# Altium PCB Neuralink.PcbDoc
Units mm, origin at the board's own origin, x right, y up, seen from the top; angles counter-clockwise.
Board outline 30 x 30 mm, 2 copper layers (Top Layer, Bottom Layer); 39 components, 25 nets, 205 pads, 47 vias.
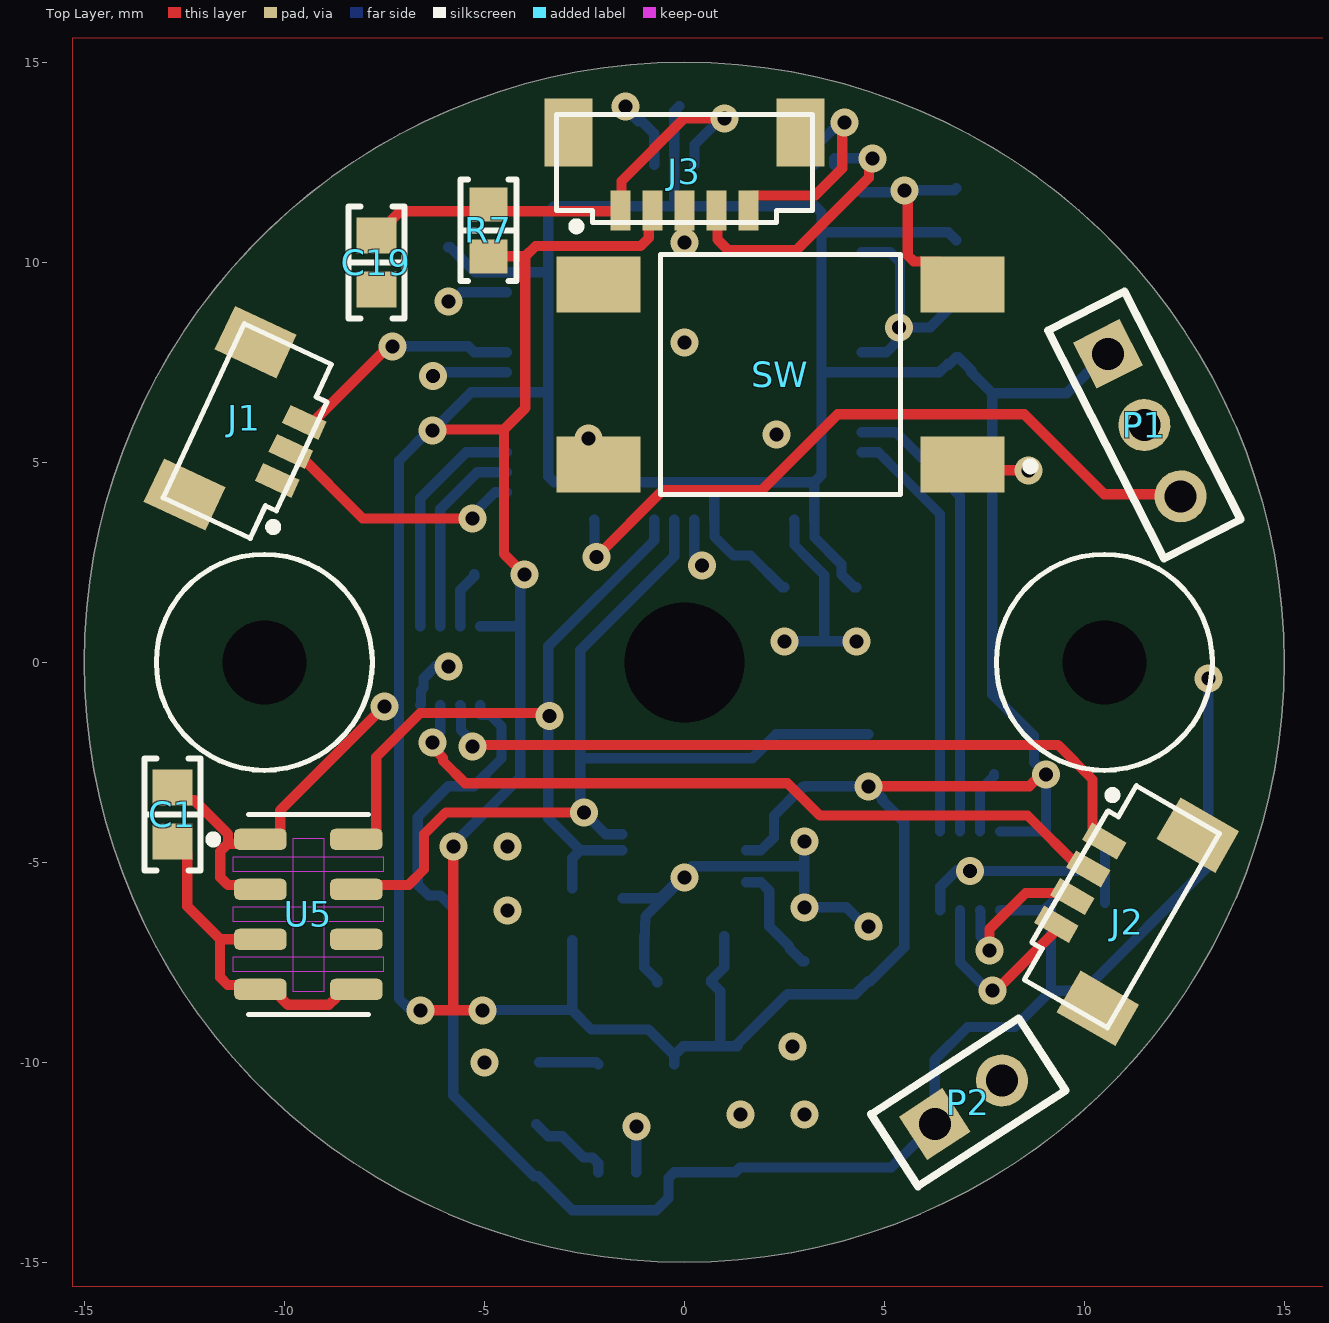
[diagram p0: Top Layer view]
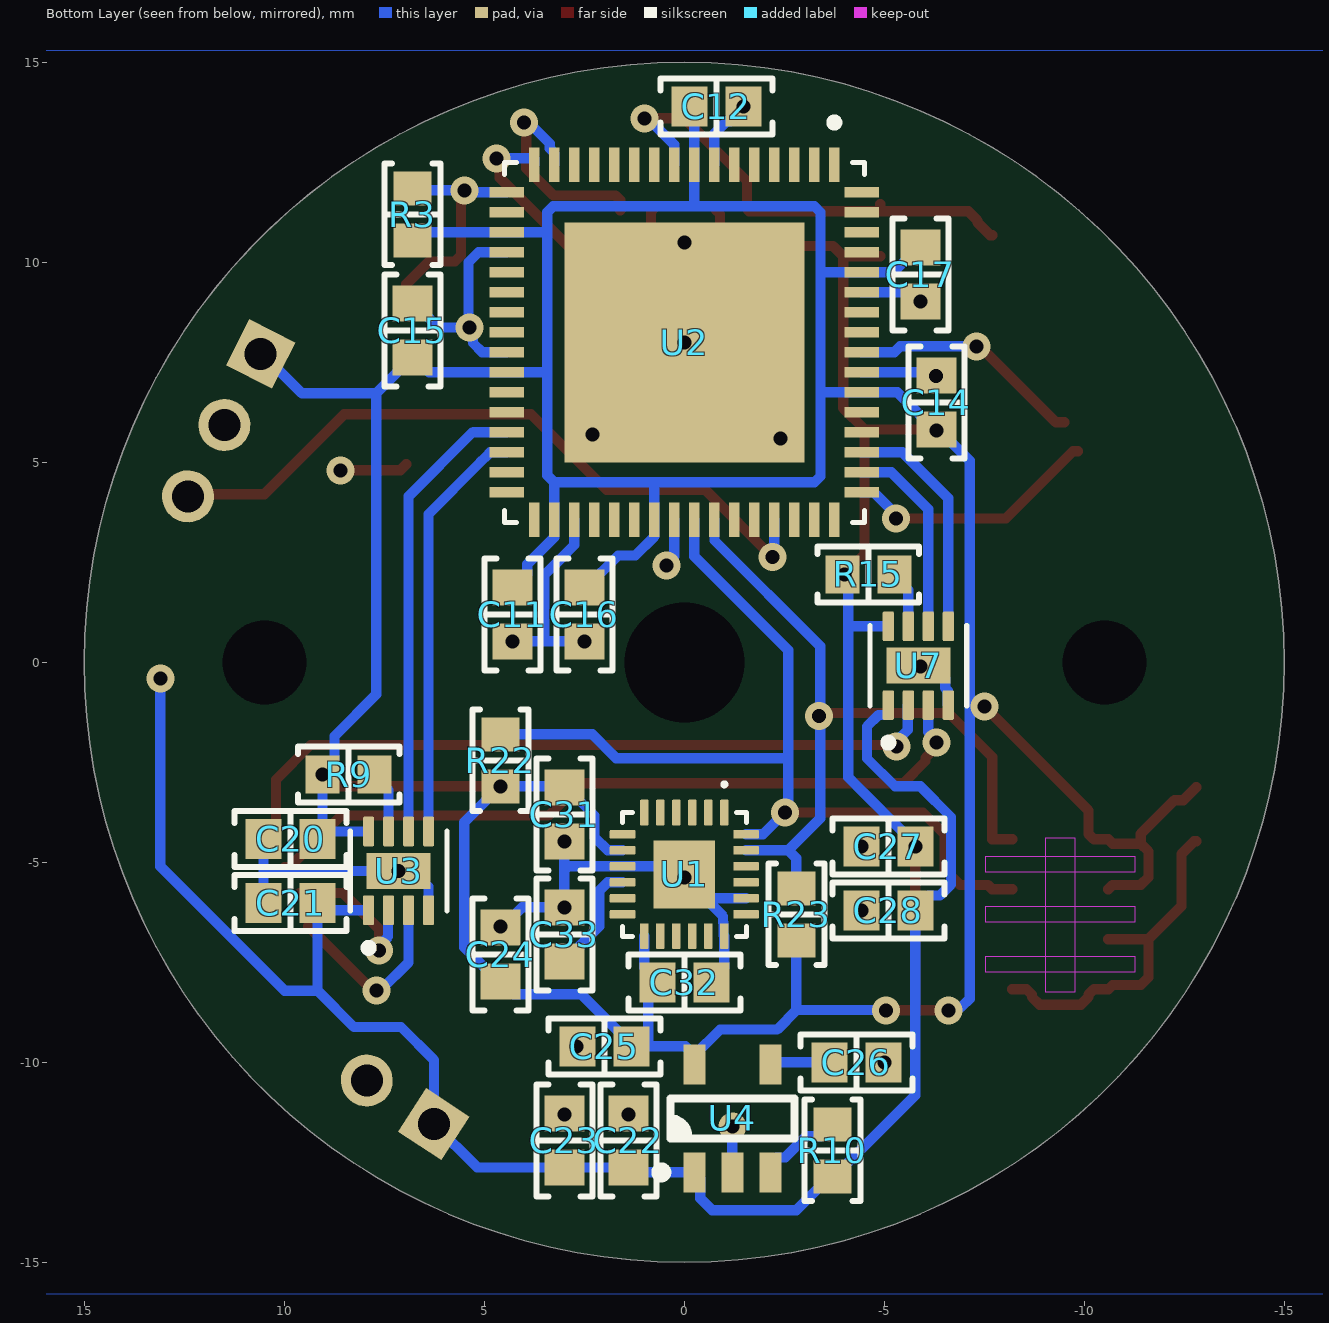
[diagram p1: Bottom Layer view, seen from below]
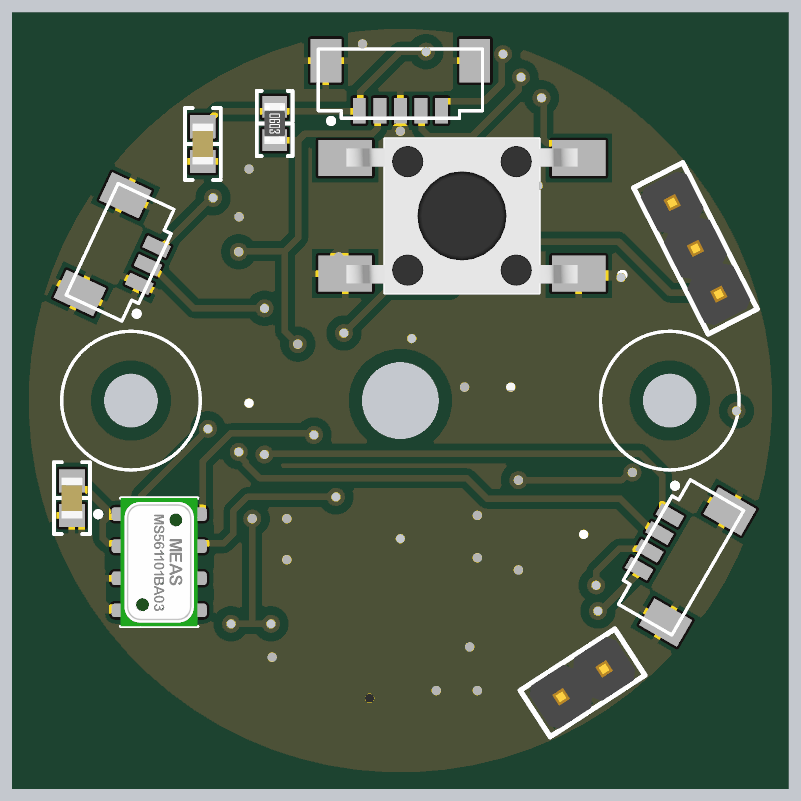
[diagram p2: 3D render of the assembled board from above, using the file's embedded part models]
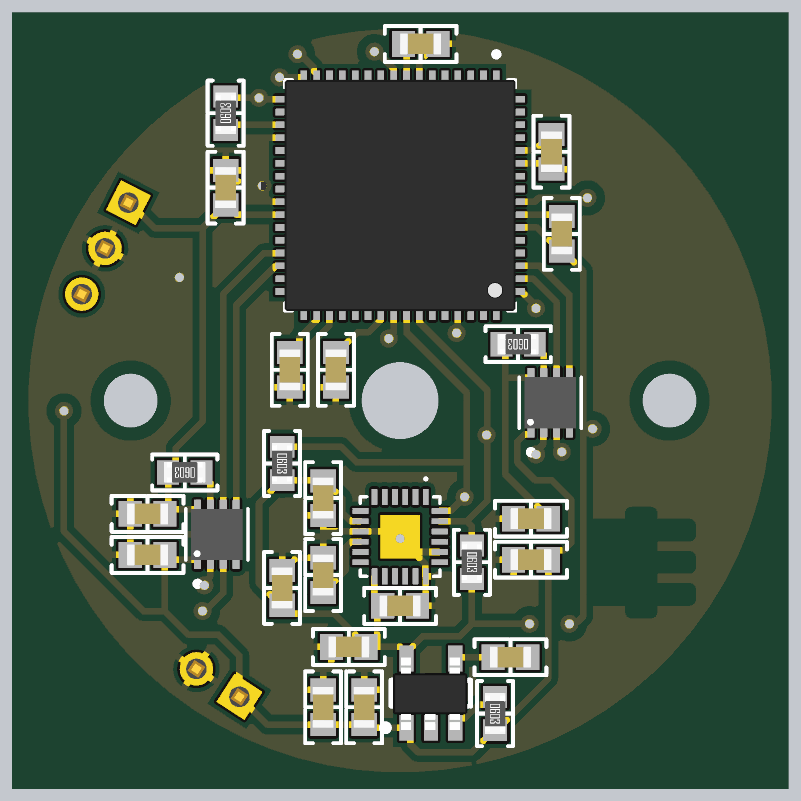
[diagram p3: 3D render of the assembled board from below, using the file's embedded part models]

## Layer stack, top to bottom
Top Solder: solder mask 0.01, Solder Resist, Dk 3.5
Top Layer: signal copper 0.035
Dielectric2: dielectric 0.32, FR-4, Dk 4.8
Bottom Layer: signal copper 0.035
Bottom Solder: solder mask 0.01, Solder Resist, Dk 3.5

## Board outline
0,-15 cw(c0,0) -15,0 cw(c0,0) 0,15 cw(c0,0) 15,0 cw(c0,0)

## Design rules (kind name [scope] priority, off if disabled: settings)
BoardOutlineClearance [All] p1: gap=0.254 ignorepadtopadclearanceinfootprint=FALSE except(0: Arc-SplitContinuation Track-SplitContinuation SMDPad-SplitContinuation THPad-SplitContinuation Via-SplitContinuation Fill-SplitContinuation Poly-SplitContinuation Region-SplitContinuation Text-SplitContinuation; 0.512: Poly-OutlineEdge Poly-CavityEdge Poly-CutoutEdge Poly-SplitBarrior)
Clearance "PolyGon Pour Clearance" [InPolygon] p1: gap=0.254 ignorepadtopadclearanceinfootprint=FALSE except(0.512: Arc-Hole Track-Hole SMDPad-Hole THPad-Hole Via-Hole Fill-Hole Poly-Hole Region-Hole Text-Hole)
Clearance [All] p2: gap=0.152 ignorepadtopadclearanceinfootprint=FALSE except(0.01: Text-Text; 0.127: Arc-Arc Arc-Track Arc-SMDPad Track-Track Track-SMDPad SMDPad-SMDPad; 0.2: Arc-THPad Arc-Fill Arc-Poly Arc-Region Arc-Hole Track-THPad Track-Fill Track-Poly Track-Region Track-Hole; 0.254: Arc-Via Track-Via Via-Via; 0.54: THPad-THPad)
HoleSize [All] p1: absolutevalues=TRUE maxlimit=6.3 minlimit=0.2 maxpercent=80.000 minpercent=20.000
HoleToHoleClearance [All] p1: gap=0.54 allowstackedmicrovias=TRUE
PlaneClearance [All] p1: clearance=0.1
PolygonConnect PolygonDirect [(IsNamedPolygon('PolygonDirect'))] p1: connectstyle=Direct reliefconductorwidth=0.254 reliefentries=4 polygonreliefangle="90 Angle" airgapwidth=0.254
PolygonConnect [IsPolygon and not (IsNamedPolygon('PolygonDirect'))] p2: thpad.connectstyle=Relief thpad.reliefconductorwidth=0.254 thpad.reliefentries=4 thpad.polygonreliefangle="90 Angle" thpad.airgapwidth=0.254 smdpad.connectstyle=Relief smdpad.reliefconductorwidth=0.254 smdpad.reliefentries=4 smdpad.polygonreliefangle="90 Angle" smdpad.airgapwidth=0.254 via.connectstyle=Direct via.reliefconductorwidth=0.254 via.reliefentries=4 via.polygonreliefangle="90 Angle" via.airgapwidth=0.254
RoutingVias [All] p1: holewidth=0.35 width=0.7 viastyle="Through Hole" minholewidth=0.3 minwidth=0.6 maxholewidth=0.5 maxwidth=10
SolderMaskExpansion [All] p1: expansion=0.102 istentingtop=FALSE
Width [All] p1: maxlimit=2 minlimit=0.127 preferedwidth=0.254
27 further rules are at their usual default settings.

## Components (designator, comment, footprint, x,y, rotation, side; value= is the part's Value field where it differs from the comment)
C1 "0.1µF" "CAP 0603_1608" -12.8,-3.8 r90 top
C11 "0.1µF" "CAP 0603_1608" 4.3,1.2 r270 bottom
C12 "0.1µF" "CAP 0603_1608" -0.8,13.9 r180 bottom
C14 "0.1µF" "CAP 0603_1608" -6.3,6.5 r90 bottom
C15 "0.1µF" "CAP 0603_1608" 6.8,8.3 r90 bottom
C16 "0.1µF" "CAP 0603_1608" 2.5,1.2 r270 bottom
C17 "0.1µF" "CAP 0603_1608" -5.9,9.7 r270 bottom
C19 "0.1µF" "CAP 0603_1608" -7.7,10 r270 top
C20 "0.1µF" "CAP 0603_1608" 9.842,-4.415 r180 bottom
C21 "0.1µF" "CAP 0603_1608" 9.842,-6.015 r0 bottom
C22 "1µF" "CAP 0603_1608" 1.4,-11.952 r270 bottom
C23 "0.1µF" "CAP 0603_1608" 3,-11.952 r90 bottom
C24 "0.1µF" "CAP 0603_1608" 4.6,-7.3 r90 bottom
C25 "1µF" "CAP 0603_1608" 2,-9.6 r180 bottom
C26 "10nF" "CAP 0603_1608" -4.3,-10 r180 bottom
C27 "0.1µF" "CAP 0603_1608" -5.1,-4.6 r180 bottom
C28 "0.1µF" "CAP 0603_1608" -5.1,-6.2 r0 bottom
C31 "0.1µF" "CAP 0603_1608" 3,-3.8 r90 bottom
C32 "0.1µF" "CAP 0603_1608" 0,-8 r0 bottom
C33 "0.1µF" "CAP 0603_1608" 3,-6.8 r90 bottom
J1 "3 pos 0.8mm" BM03B-SURS -9.5,6 r245 top
J2 "4 pos 0.8mm" BM04B-SURS 9.7,-5.856 r60 top
J3 "5 pos 0.8mm" BM05B-SURS 0,11.3 r180 top
P1 "62000311121" 62000311121 11.5,5.932 r297 top
P2 "62000211121" 62000211121 7.1,-11 r33 top
R3 "10 kOhms" "RES 0603_1608" 6.8,11.2 r90 bottom
R7 "10 kOhms" "RES 0603_1608" -4.9,10.8 r270 top
R9 "1 kOhms" "RES 0603_1608" 8.392,-2.8 r0 bottom
R10 "10 k" "RES 0603_1608" -3.7,-12.2 r270 bottom
R15 "1 kOhms" "RES 0603_1608" -4.6,2.2 r0 bottom
R22 "4.7 kOhms" "RES 0603_1608" 4.6,-2.45 r270 bottom
R23 "4.7 kOhms" "RES 0603_1608" -2.8,-6.3 r270 bottom
SW "Push Button SMD" "SMD button" 2.4,7.2 r180 top
U1 "ICM-20649" ICM-20649 0,-5.3 r270 bottom
U2 "PIC32MZ0512EFE064" QFN50P900X900X100-65N 0,8 r270 bottom
U3 "DRV8837CDSGR" SON50P200X200X80-9N 7.142,-5.215 r90 bottom
U4 "3.3V LDO" "TI SOT-23-5 DBV" -1.2,-11.4 r90 bottom
U5 "MS5611" MS5611 -9.4,-6.3 r0 top
U7 "DRV8837CDSGR" SON50P200X200X80-9N -5.85,-0.085 r90 bottom

## Footprints (in the part's own frame and the unit in brackets; to place one, negate y for a bottom-side part, rotate by r counter-clockwise, add the part's x,y. Pads: shape width x height; smd on the part's side, far side on the other; paste and mask are expansions set on the pad)
62000211121 [mm] "Pin Header, pitch 2.00 mm, THT, Vertical, single row, 2p"
  rect 1.3x1.3 hole 0.8: 1(-1,0)
  round 1.3 hole 0.8: 2(1,0)
  silkscreen extent -2.2,-1.08 2.2,1.08, body extent -2,-1 2,1, height 6.05
62000311121 [mm] "Pin Header, pitch 2.00 mm, THT, Vertical, single row, 3p"
  rect 1.3x1.3 hole 0.8: 1(-2,0)
  round 1.3 hole 0.8: 2(0,0) 3(2,0)
  silkscreen extent -3.2,-1.07 3.2,1.07, body extent -3,-1 3,1, height 6.05
BM03B-SURS [mm]
  rect 0.5x1 smd: 1(1.6,0) 2(0.8,0) 3(0,0)
  rect 1.2x1.7 smd: S1(2.9,-1.95) S2(-1.3,-1.95)
  silkscreen extent -1.6,-2.4 3.2,0.5, body extent -1.6,-2.4 3.2,0.3, height 1.75
BM04B-SURS [mm]
  rect 0.5x1 smd: 1(1.6,0) 2(0.8,0) 3(0,0) 4(-0.8,0)
  rect 1.2x1.7 smd: S1(2.9,-1.95) S2(-2.1,-1.95)
  silkscreen extent -2.4,-2.4 3.2,0.5, body extent -2.4,-2.4 3.2,0.3, height 1.75
BM05B-SURS [mm]
  rect 0.5x1 smd: 1(1.6,0) 2(0.8,0) 3(0,0) 4(-0.8,0) 5(-1.6,0)
  rect 1.2x1.7 smd: S1(2.9,-1.95) S2(-2.9,-1.95)
  silkscreen extent -3.2,-2.4 3.2,0.5, body extent -3.2,-2.4 3.2,0.3, height 1.75
"CAP 0603_1608" [mm] "Chip Capacitor, 2-Leads, Body 1.60x0.80mm, IPC Medium Density"
  rect 0.9x1 smd: 1(-0.675,0) 2(0.675,0)
  silkscreen extent -1.4,-0.7 1.4,0.7, body extent -0.8,-0.41 0.8,0.41, height 0.82
ICM-20649 [mm]
  rrect25% 0.64x0.22 smd: 1(-1.545,1) 2(-1.545,0.6) 3(-1.545,0.2) 4(-1.545,-0.2) 5(-1.545,-0.6) 6(-1.545,-1) 13(1.545,-1) 14(1.545,-0.6) 15(1.545,-0.2) 16(1.545,0.2) 17(1.545,0.6) 18(1.545,1)
  rrect25% 0.22x0.64 smd: 7(-1,-1.545) 8(-0.6,-1.545) 9(-0.2,-1.545) 10(0.2,-1.545) 11(0.6,-1.545) 12(1,-1.545) 19(1,1.545) 20(0.6,1.545) 21(0.2,1.545) 22(-0.2,1.545) 23(-0.6,1.545) 24(-1,1.545)
  rect 1.7x1.54 smd paste-2: 25(0,0)
  silkscreen extent -2.3,-1.55 1.55,1.55, body extent -1.55,-1.55 1.55,1.55, height 0.95
MS5611 [mm]
  rrect50% 1.31x0.53 smd: 1(-1.2,1.875) 2(-1.2,0.625) 3(-1.2,-0.625) 4(-1.2,-1.875) 5(1.2,-1.875) 6(1.2,-0.625) 7(1.2,0.625) 8(1.2,1.875)
  Keep-Out Layer region: 0.381,-1.935 -0.375,-1.935 -0.375,1.905 0.381,1.905
  Keep-Out Layer region: 0.381,-1.935 -0.375,-1.935 -0.375,1.905 0.381,1.905
  Keep-Out Layer region: 0.381,-1.935 -0.375,-1.935 -0.375,1.905 0.381,1.905
  Keep-Out Layer region: 1.875,-1.439 -1.877,-1.439 -1.877,-1.062 1.875,-1.062
  Keep-Out Layer region: 1.875,-1.44 -1.878,-1.44 -1.878,-1.062 1.875,-1.062
  Keep-Out Layer region: 1.875,-1.44 -1.878,-1.44 -1.878,-1.062 1.875,-1.062
  Keep-Out Layer region: 1.875,-0.188 -1.877,-0.188 -1.877,0.188 1.875,0.188
  Keep-Out Layer region: 1.875,-0.188 -1.878,-0.188 -1.878,0.188 1.875,0.188
  Keep-Out Layer region: 1.875,-0.188 -1.878,-0.188 -1.878,0.188 1.875,0.188
  Keep-Out Layer region: 1.875,1.063 -1.876,1.063 -1.876,1.438 1.875,1.438
  Keep-Out Layer region: 1.875,1.064 -1.878,1.064 -1.878,1.438 1.875,1.438
  Keep-Out Layer region: 1.875,1.063 -1.875,1.063 -1.875,1.438 1.875,1.438
  silkscreen extent -2.48,-2.5 1.5,2.5, body extent -1.5,-2.5 1.5,2.5, height 1
QFN50P900X900X100-65N [mm]
  rect 0.86x0.26 smd: 1(-4.435,3.75) 2(-4.435,3.25) 3(-4.435,2.75) 4(-4.435,2.25) 5(-4.435,1.75) 6(-4.435,1.25) 7(-4.435,0.75) 8(-4.435,0.25) 9(-4.435,-0.25) 10(-4.435,-0.75) 11(-4.435,-1.25) 12(-4.435,-1.75) 13(-4.435,-2.25) 14(-4.435,-2.75) 15(-4.435,-3.25) 16(-4.435,-3.75) 33(4.435,-3.75) 34(4.435,-3.25) 35(4.435,-2.75) 36(4.435,-2.25) 37(4.435,-1.75) 38(4.435,-1.25) 39(4.435,-0.75) 40(4.435,-0.25) 41(4.435,0.25) 42(4.435,0.75) 43(4.435,1.25) 44(4.435,1.75) 45(4.435,2.25) 46(4.435,2.75) 47(4.435,3.25) 48(4.435,3.75)
  rect 0.26x0.86 smd: 17(-3.75,-4.435) 18(-3.25,-4.435) 19(-2.75,-4.435) 20(-2.25,-4.435) 21(-1.75,-4.435) 22(-1.25,-4.435) 23(-0.75,-4.435) 24(-0.25,-4.435) 25(0.25,-4.435) 26(0.75,-4.435) 27(1.25,-4.435) 28(1.75,-4.435) 29(2.25,-4.435) 30(2.75,-4.435) 31(3.25,-4.435) 32(3.75,-4.435) 49(3.75,4.435) 50(3.25,4.435) 51(2.75,4.435) 52(2.25,4.435) 53(1.75,4.435) 54(1.25,4.435) 55(0.75,4.435) 56(0.25,4.435) 57(-0.25,4.435) 58(-0.75,4.435) 59(-1.25,4.435) 60(-1.75,4.435) 61(-2.25,4.435) 62(-2.75,4.435) 63(-3.25,4.435) 64(-3.75,4.435)
  rect 6x6 smd: 65(0,0)
  silkscreen extent -5.59,-4.5 4.5,4.5, body extent -4.52,-4.52 4.52,4.52, height 0.9
"RES 0603_1608" [mm] "Chip Resistor, 2-Leads, Body 1.60x0.80mm, IPC Medium Density"
  rect 0.85x0.95 smd: 1(-0.65,0) 2(0.65,0)
  silkscreen extent -1.27,-0.7 1.27,0.7, body extent -0.8,-0.4 0.8,0.4, height 0.45
"SMD button" [mm]
  rect 2.1x1.4 smd: 1(-4.55,2.25) 2(4.55,2.25) 3(-4.55,-2.25) 4(4.55,-2.25)
  silkscreen extent -6.35,-3 3,3, body extent -4.51,-3.02 4.51,3.02, height 5
SON50P200X200X80-9N [mm]
  rrect25% 0.74x0.28 smd: 1(-0.985,0.75) 2(-0.985,0.25) 3(-0.985,-0.25) 4(-0.985,-0.75) 5(0.985,-0.75) 6(0.985,-0.25) 7(0.985,0.25) 8(0.985,0.75)
  rect 0.9x1.6 smd paste-2: 9(0,0)
  silkscreen extent -2.02,-1.21 1,1.21, body extent -1,-1 1,1, height 0.75
"TI SOT-23-5 DBV" [mm] "SOT23, 5-Leads, Body 2.90x2.80mm, Pitch 0.95mm, IPC Medium Density"
  rect 1x0.55 smd: 1(-1.35,0.95) 2(-1.35,0) 3(-1.35,-0.95) 4(1.35,-0.95) 5(1.35,0.95)
  silkscreen extent -1.47,-1.55 0.5,1.9, body extent -1.44,-1.42 1.39,1.48, height 1.5

## Part data
C1 C11 C12 C14 C15 C16 C17 C19 C20 C21 C23 C24 C27 C28 C31 C33: library part GCG188R92A104KA03D, "CAP CER 0.1UF 100V 0603 EPOXY", Device Package="0603 (1608 Metric)", Manufacturer="Murata Electronics", Operating Temperature="-55°C ~ 150°C", Ratings=AEC-Q200, Supplier Part Number 1=490-18197-1-ND, Temperature Coefficient=X8R, Tolerance=±10%, Voltage - Rated=100V, Applications=Automotive, Capacitance=0.1µF, ComponentLink1Description=Datasheet, ComponentLink1URL=https://search.murata.co.jp/Ceramy/image/img/A01X/G101/ENG/GCG188R92A104KA03-01.pdf, ComponentLink2Description="DigiKey Link", ComponentLink2URL=http://digikey.com/product-detail/en/murata-electronics/GCG188R92A104KA03D/490-18197-1-ND/9867926, Features="Epoxy Mountable", LastUpdated="21-Jan-20 12:01:59 AM", Lifecycle Status=Active, Minimum Order=1, Mounting Type="Surface Mount, MLCC, Epoxy", Package / Case="0603 (1608 Metric)", Packaging=TapeAndReel, Part Number=GCG188R92A104KA03D, Part Status=Active, PartId=9025, Price=0.07, Series=GCG, Size / Dimension="0.063\" L x 0.031\" W (1.60mm x 0.80mm)", Supplier 1=DigiKey, Thickness (Max)="0.035\" (0.90mm)"
C22 C25: library part GCJ188R71E105KA01D, "CAP CER 1UF 25V X7R 0603", Device Package="0603 (1608 Metric)", Manufacturer="Murata Electronics", Operating Temperature="-55°C ~ 125°C", Ratings=AEC-Q200, Supplier Part Number 1=490-14409-1-ND, Temperature Coefficient=X7R, Tolerance=±10%, Applications="Automotive, Boardflex Sensitive", Capacitance=1µF, ComponentLink1Description=Datasheet, ComponentLink1URL=https://search.murata.co.jp/Ceramy/image/img/A01X/G101/ENG/GCJ188R71E105KA01-01.pdf, ComponentLink2Description="DigiKey Link", ComponentLink2URL=http://digikey.com/product-detail/en/murata-electronics/GCJ188R71E105KA01D/490-14409-1-ND/6606870, Features="Soft Termination", LastUpdated="13-Aug-20 10:24:06 AM", Lifecycle Status=Active, Minimum Order=1, Mounting Type="Surface Mount, MLCC", Package / Case="0603 (1608 Metric)", Packaging=TapeAndReel, Part Number=GCJ188R71E105KA01D, Part Status=Active, PartId=9566, Price=0.05, Series=GCJ, Size / Dimension="0.063\" L x 0.031\" W (1.60mm x 0.80mm)", Supplier 1=DigiKey, Thickness (Max)="0.035\" (0.90mm)"
C26: library part GCG188R92A104KA03D, "CAP CER 0.1UF 100V 0603 EPOXY", Capacitance=0.1µF, Device Package="0603 (1608 Metric)", Manufacturer="Murata Electronics", Operating Temperature="-55°C ~ 150°C", Ratings=AEC-Q200, Supplier Part Number 1=490-18197-1-ND, Temperature Coefficient=X8R, Tolerance=±10%, Voltage - Rated=100V, Applications=Automotive, ComponentLink1Description=Datasheet, ComponentLink1URL=https://search.murata.co.jp/Ceramy/image/img/A01X/G101/ENG/GCG188R92A104KA03-01.pdf, ComponentLink2Description="DigiKey Link", ComponentLink2URL=http://digikey.com/product-detail/en/murata-electronics/GCG188R92A104KA03D/490-18197-1-ND/9867926, Features="Epoxy Mountable", LastUpdated="21-Jan-20 12:01:59 AM", Lifecycle Status=Active, Minimum Order=1, Mounting Type="Surface Mount, MLCC, Epoxy", Package / Case="0603 (1608 Metric)", Packaging=TapeAndReel, Part Number=GCG188R92A104KA03D, Part Status=Active, PartId=9025, Price=0.07, Series=GCG, Size / Dimension="0.063\" L x 0.031\" W (1.60mm x 0.80mm)", Supplier 1=DigiKey, Thickness (Max)="0.035\" (0.90mm)"
C32: library part C0603C103KARACAUTO, "CAP CER 0.01UF 250V X7R 0603", Capacitance=0.01µF, Device Package="0603 (1608 Metric)", Manufacturer=KEMET, Operating Temperature="-55°C ~ 125°C", Ratings=AEC-Q200, Supplier Part Number 1=399-17960-1-ND, Temperature Coefficient=X7R, Tolerance=±10%, Applications="Automotive, Bypass, Decoupling", ComponentLink1Description=Datasheet, ComponentLink1URL=https://api.kemet.com/component-edge/download/datasheet/C0603C103KARACAUTO.pdf, ComponentLink2Description="DigiKey Link", ComponentLink2URL=http://digikey.com/product-detail/en/kemet/C0603C103KARACAUTO/399-17960-1-ND/9084030, LastUpdated="13-Aug-20 10:21:06 AM", Lifecycle Status=Active, Minimum Order=1, Mounting Type="Surface Mount, MLCC", Package / Case="0603 (1608 Metric)", Packaging=TapeAndReel, Part Number=C0603C103KARACAUTO, Part Status=Active, PartId=15195, Price=0.25, Series="SMD Auto X7R", Size / Dimension="0.063\" L x 0.031\" W (1.60mm x 0.80mm)", Supplier 1=DigiKey, Thickness (Max)="0.034\" (0.87mm)"
J1: library part BM03B-SURS
J2: library part BM04B-SURS
J3: library part BM05B-SURS
P1: "WR-PHD Pin Header, THT, pitch 2mm, Single Row, Vertical, 3p", Contact Resistance=20mOhm, Manufacturer="Wurth Elektronik", Operating Temperature="-40 to +105degC", Rated Current=2A, Withstanding Voltage=500VAC, Working Voltage=200VAC, ComponentLink1Description=Manufacturer, ComponentLink1URL=http://www.we-online.de, ComponentLink2Description=Datasheet, ComponentLink2URL=https://www.we-online.com/catalog/datasheet/62000311121.pdf, Gender="Pin Header", Manufacturer Part Number=62000311121, Mounting Technology=THT, Orientation=Vertical, Packaging=Bag, Pin Number=3, Pitch=2mm, Published Date="May 2020", Row Number=Single
P2: "WR-PHD Pin Header, THT, pitch 2mm, Single Row, Vertical, 2p", Contact Resistance=20mOhm, Manufacturer="Wurth Elektronik", Operating Temperature="-40 to +105degC", Rated Current=2A, Withstanding Voltage=500VAC, Working Voltage=200VAC, ComponentLink1Description=Manufacturer, ComponentLink1URL=http://www.we-online.de, ComponentLink2Description=Datasheet, ComponentLink2URL=https://www.we-online.com/catalog/datasheet/62000211121.pdf, Gender="Pin Header", Manufacturer Part Number=62000211121, Mounting Technology=THT, Orientation=Vertical, Packaging=Bag, Pin Number=2, Pitch=2mm, Published Date="May 2020", Row Number=Single
R3: library part RT0603FRE071KL, "RES SMD 1K OHM 1% 1/10W 0603", Device Package="0603 (1608 Metric)", Manufacturer=Yageo, Operating Temperature="-55°C ~ 155°C", Power (Watts)="0.1W, 1/10W", Resistance="1 kOhms", Supplier Device Package=0603, Supplier Part Number 1=YAG2323CT-ND, Temperature Coefficient=±50ppm/°C, Tolerance=±1%, ComponentLink1Description=Datasheet, ComponentLink1URL=https://www.yageo.com/upload/media/product/productsearch/datasheet/rchip/PYu-RT_1-to-0.01_RoHS_L_11.pdf, ComponentLink2Description="DigiKey Link", ComponentLink2URL=http://digikey.com/product-detail/en/yageo/RT0603FRE071KL/YAG2323CT-ND/5252437, Composition="Thin Film", Height - Seated (Max)="0.022\" (0.55mm)", LastUpdated="21-Jan-20 12:24:38 AM", Lifecycle Status=Active, Minimum Order=1, Number of Terminations=2, Package / Case="0603 (1608 Metric)", Packaging=TapeAndReel, Part Number=RT0603FRE071KL, Part Status=Active, PartId=5672, Price=0.01, Series=RT, Size / Dimension="0.063\" L x 0.031\" W (1.60mm x 0.80mm)", Supplier 1=DigiKey
R7: library part RNCS0603BKE10K0, "RES 10K OHM 0.1% 1/16W 0603", Device Package="0603 (1608 Metric)", Manufacturer="Stackpole Electronics Inc", Operating Temperature="-55°C ~ 155°C", Power (Watts)="0.063W, 1/16W", Ratings=AEC-Q200, Supplier Device Package=0603, Supplier Part Number 1=RNCS0603BKE10K0CT-ND, Temperature Coefficient=±25ppm/°C, Tolerance=±0.1%, ComponentLink1Description=Datasheet, ComponentLink1URL=https://www.seielect.com/catalog/sei-rncs_rnch.pdf, ComponentLink2Description="DigiKey Link", ComponentLink2URL=http://digikey.com/product-detail/en/stackpole-electronics-inc/RNCS0603BKE10K0/RNCS0603BKE10K0CT-ND/1800113, Composition="Thin Film", Features="Anti-Corrosive, Automotive AEC-Q200, Moisture Resistant", Height - Seated (Max)="0.022\" (0.55mm)", LastUpdated="13-Aug-20 10:37:13 AM", Lifecycle Status=Active, Minimum Order=1, Number of Terminations=2, Package / Case="0603 (1608 Metric)", Packaging=TapeAndReel, Part Number=RNCS0603BKE10K0, Part Status=Active, PartId=4838, Price=0.08, Resistance="10 kOhms", Series=RNCS, Size / Dimension="0.061\" L x 0.031\" W (1.55mm x 0.80mm)", Supplier 1=DigiKey
R9 R15: library part RT0603FRE071KL, "RES SMD 1K OHM 1% 1/10W 0603", Device Package="0603 (1608 Metric)", Manufacturer=Yageo, Operating Temperature="-55°C ~ 155°C", Power (Watts)="0.1W, 1/10W", Supplier Device Package=0603, Supplier Part Number 1=YAG2323CT-ND, Temperature Coefficient=±50ppm/°C, Tolerance=±1%, ComponentLink1Description=Datasheet, ComponentLink1URL=https://www.yageo.com/upload/media/product/productsearch/datasheet/rchip/PYu-RT_1-to-0.01_RoHS_L_11.pdf, ComponentLink2Description="DigiKey Link", ComponentLink2URL=http://digikey.com/product-detail/en/yageo/RT0603FRE071KL/YAG2323CT-ND/5252437, Composition="Thin Film", Height - Seated (Max)="0.022\" (0.55mm)", LastUpdated="21-Jan-20 12:24:38 AM", Lifecycle Status=Active, Minimum Order=1, Number of Terminations=2, Package / Case="0603 (1608 Metric)", Packaging=TapeAndReel, Part Number=RT0603FRE071KL, Part Status=Active, PartId=5672, Price=0.01, Resistance="1 kOhms", Series=RT, Size / Dimension="0.063\" L x 0.031\" W (1.60mm x 0.80mm)", Supplier 1=DigiKey
R10: library part RNCS0603BKE10K0, "RES 10K OHM 0.1% 1/16W 0603", Device Package="0603 (1608 Metric)", Manufacturer="Stackpole Electronics Inc", Operating Temperature="-55°C ~ 155°C", Power (Watts)="0.063W, 1/16W", Ratings=AEC-Q200, Resistance="10 kOhms", Supplier Device Package=0603, Supplier Part Number 1=RNCS0603BKE10K0CT-ND, Temperature Coefficient=±25ppm/°C, Tolerance=±0.1%, ComponentLink1Description=Datasheet, ComponentLink1URL=https://www.seielect.com/catalog/sei-rncs_rnch.pdf, ComponentLink2Description="DigiKey Link", ComponentLink2URL=http://digikey.com/product-detail/en/stackpole-electronics-inc/RNCS0603BKE10K0/RNCS0603BKE10K0CT-ND/1800113, Composition="Thin Film", Features="Anti-Corrosive, Automotive AEC-Q200, Moisture Resistant", Height - Seated (Max)="0.022\" (0.55mm)", LastUpdated="21-Jan-20 12:25:01 AM", Lifecycle Status=Active, Minimum Order=1, Number of Terminations=2, Package / Case="0603 (1608 Metric)", Packaging=TapeAndReel, Part Number=RNCS0603BKE10K0, Part Status=Active, PartId=4838, Price=0.08, Series=RNCS, Size / Dimension="0.061\" L x 0.031\" W (1.55mm x 0.80mm)", Supplier 1=DigiKey
R22 R23: library part CPF-A-0603B4K7E, "RES SMD 4.7K OHM 0.1% 1/16W 0603", Device Package="0603 (1608 Metric)", Manufacturer="TE Connectivity Passive Product", Operating Temperature="-55°C ~ 155°C", Power (Watts)="0.063W, 1/16W", Ratings=AEC-Q200, Supplier Device Package=0603, Supplier Part Number 1=A124067CT-ND, Temperature Coefficient=±25ppm/°C, Tolerance=±0.1%, ComponentLink1Description=Datasheet, ComponentLink1URL=https://www.te.com/commerce/DocumentDelivery/DDEController?Action=srchrtrv&DocNm=1773200-1&DocType=DS&DocLang=English, ComponentLink2Description="DigiKey Link", ComponentLink2URL=http://digikey.com/product-detail/en/te-connectivity-passive-product/CPF-A-0603B4K7E/A124067CT-ND/5969987, Composition="Thin Film", Features="Anti-Sulfur, Automotive AEC-Q200, Moisture Resistant", Height - Seated (Max)="0.022\" (0.55mm)", LastUpdated="13-Aug-20 10:37:07 AM", Lifecycle Status=Active, Minimum Order=1, Number of Terminations=2, Package / Case="0603 (1608 Metric)", Packaging=TapeAndReel, Part Number=CPF-A-0603B4K7E, Part Status=Active, PartId=8242, Price=0.09, Resistance="4.7 kOhms", Series="CPF-A, Neohm", Size / Dimension="0.061\" L x 0.031\" W (1.55mm x 0.80mm)", Supplier 1=DigiKey
SW: "50 mA SPST Round Actuator 160 Gram Force Tactile Pushbutton Switch", Contact_Current_Rating="50 mA", Package=None, Availability=Unavailable, Configuration_Pole-Throw="Single Pole - Single Throw", EU_RoHS_Compliance=Compliant, MF="TE Connectivity", MP=1825910-2, Price=None, SnapEDA_Link=https://www.snapeda.com/parts/1825910-2/TE%20Connectivity%20ALCOSWITCH%20Switches/view-part/278983/?ref=snap, TE_purchase_URL=https://www.te.com/usa-en/product-1825910-2.html?te_bu=Cor&te_type=disp&te_campaign=seda_glo_cor-seda-global-disp-prtnr-fy19-seda-model-bom-cta_sma-317_1&elqCampaignId=32493
U1: "6-DOF IMU"
U2: library part PIC32MZ0512EFE064-I/PT, "32-bit Microcontrollers - MCU 32-BIT MCU 512KB FL 128KB RAM, No Crypto", Package="TQFP-64 Microchip", Availability=Unavailable, MF=Microchip, MP=PIC32MZ2048EFG064T-I/PT, Price=None, SnapEDA_Link=https://www.snapeda.com/parts/PIC32MZ2048EFG064T-I/PT/Microchip/view-part/565997/?ref=snap
U3 U7: "11-V, 1-A H-bridge motor driver 8-WSON -40 to 85", Package="WSON-8 Texas Instruments", Availability=Good, DigiKey-Purchase-URL=https://snapeda.com/shop?store=DigiKey&id=617854, MF="Texas Instruments", Mouser-Purchase-URL=https://snapeda.com/shop?store=Mouser&id=617854, MP=DRV8837CDSGR, Price=None, SnapEDA_Link=https://www.snapeda.com/parts/DRV8837CDSGR/Texas%20Instruments/view-part/617854/?ref=snap, Texas_Instruments-Purchase-URL=https://snapeda.com/shop?store=Texas+Instruments&id=617854
U4: library part MIC5504-3.3YM5
U5: "Altimeter"

## Free pads (board coordinates)
  round 0 hole 2.1 unplated: 1(-10.5,0) 1(10.5,0)
  round 0 hole 3 unplated: 1(0,0)

## Via types
v1: diameter 0.7, hole 0.35, Top Layer to Bottom Layer, tented both sides, 47 vias

## Nets (pads, with @x,y where several pads share a name; then routed paths per layer and width w, separated by ;. In a path a pad name is that pad's centre, name@x,y a point inside that pad or via, vN(x,y) a via of type N, cw(c..) or ccw(c..) an arc to the next point about the centre after c; other vN are vias at no path point)
3V3: C1.2 C11.1 C12.1 C14.1 C15.1 C16.1 C17.1 C20.2 C24.1 C25.2 C27.2 C31.2 C32.2 J3.2 P1.1 R3.1 R7.2 R9.2 R15.2 R22.2 R23.2 U1.8 U1.13 U2.8 U2.19 U2.26 U2.34 U2.39 U2.54 U2.60 U3.8 U4.5 U5.1 U5.2 U7.8 | length 151.8
  Top Layer w0.254: C1.2 -12.477,-3.448 -12.252,-3.448 -11.411,-4.289 -11.411,-4.536 ; U5.2 -10.711,-5.564 -11.411,-5.564 -11.603,-5.373 -11.603,-4.727 -11.411,-4.536 ; v1(-7.5,-1.1) -10.102,-3.702 -10.102,-4.287 -10.24,-4.425 U5.1 -10.71,-4.536 -11.411,-4.536 ; v1(-6.6,-8.7) -5.822,-8.7 ; v1(-6.3,5.8) -6.276,5.824 -4.505,5.824 ; v1(-5.775,-4.6) -5.775,-8.653 -5.822,-8.7 ; v1(-5.044,-8.7) -5.822,-8.7 ; R7.2 -3.975,10.15 ; v1(-4,2.2) -4.505,2.705 -4.505,5.824 ; J3.2 -0.89,11.21 -0.89,10.61 -1.096,10.404 -3.721,10.404 -3.975,10.15 ; v1(4.6,-3.1) 8.622,-3.1 8.922,-2.8 v1(9.042,-2.8) ; -4.505,5.824 -3.975,6.354 -3.975,10.15
  Bottom Layer w0.254: v1(-7.5,-1.1) -7.134,-1.1 ; v1(-6.6,-8.7) -6.685,-8.615 -6.93,-8.615 -7.134,-8.41 -7.134,-1.1 ; C14.1 C14.1@-6.25,5.825 ; C17.1 -5.85,10.375 -5.228,9.753 -4.438,9.753 U2.60 -3.403,9.75 ; v1(-5.775,-4.6) -5.775,-4.55 -4.1,-2.875 -4.1,0.9 ; U7.8 -4.1,0.9 ; v1(-5.044,-8.7) -5.033,-8.689 -2.815,-8.689 ; v1(-4,2.2) R15.2 -4.1,2.05 -4.1,0.9 ; R23.2 -2.8,-8.675 -2.815,-8.689 ; U4.5 U4.5@-0.25,-9.825 ; C12.1 -0.25,13.775 U2.8 -0.25,11.403 ; C32.2 0.9,-8.225 C25.2@0.9,-9.6 ; C32.2@0.675,-7.95 1,-7.625 U1.13 ; U1.8 1.918,-4.7 2.246,-4.372 2.246,-3.829 2.95,-3.125 C31.2 3.025,-3.1 v1(4.6,-3.1) 4.65,-3.1 4.948,-3.398 4.948,-3.448 5.5,-4 5.5,-7.125 4.65,-7.975 C24.1 4.277,-8.298 2.577,-8.298 1.325,-9.55 C25.2 C25.2@0.9,-9.6 ; C16.1 2.45,1.875 1.655,2.67 1.225,2.67 0.753,3.143 0.753,3.562 U2.39 0.75,4.5 ; C11.1 4.25,1.875 3.927,2.198 3.927,2.451 3.253,3.125 3.253,3.562 U2.34 3.25,4.5 ; C15.1@6.59,7.465 6.375,7.25 U2.26 3.426,7.25 ; C15.1@6.615,7.44 C15.1 6.85,7.625 7.173,7.302 7.173,7.252 7.7,6.725 ; R3.1 6.6,10.75 U2.19 3.426,10.75 ; U3.8 8.982,-4.23 C20.2@9.042,-4.29 ; C20.2 C20.2@9.042,-4.29 ; P1.1@10.5,7.664 9.561,6.725 7.7,6.725 ; -7.134,-1.1 -7.134,5.041 -6.375,5.8 v1(-6.3,5.8) -6.275,5.8 C14.1@-6.25,5.825 ; C14.1@-6.25,5.825 -5.325,6.75 U2.54 -3.403,6.75 ; -3.403,6.75 -3.403,9.75 ; -3.403,6.75 -3.403,4.649 -3.254,4.5 0.75,4.5 ; -3.403,9.75 -3.403,11.254 -3.254,11.403 -0.25,11.403 ; -2.815,-8.689 -2.321,-9.183 -0.892,-9.183 U4.5@-0.25,-9.825 ; U4.5@-0.25,-9.825 -0.025,-9.6 C25.2@0.9,-9.6 ; -0.25,11.403 3.277,11.403 3.426,11.254 3.426,10.75 ; 0.75,4.5 3.25,4.5 ; 3.25,4.5 3.426,4.676 3.426,7.25 ; 3.426,7.25 3.426,10.75 ; 7.7,6.725 7.7,-0.8 8.744,-1.844 8.744,-2.502 v1(9.042,-2.8) C20.2@9.042,-4.29
A_IN1: U2.50 U7.6 | length 5
  Bottom Layer w0.254: U7.6 -6.1,3.825 -5.175,4.75 U2.50
A_IN2: U2.51 U7.5 | length 5.8
  Bottom Layer w0.254: U7.5 -6.6,4.1 -5.45,5.25 U2.51
B_IN1: U2.29 U3.6 | length 11.5
  Bottom Layer w0.254: U2.29 5.263,5.75 5.266,5.747 5.301,5.747 6.892,4.155 6.892,3.293 U3.6
B_IN2: U2.30 U3.5 | length 10.5
  Bottom Layer w0.254: U2.30 4.85,5.25 4.966,5.134 4.97,5.134 5.119,4.985 5.119,4.981 6.392,3.708 U3.5
BUTTON: R3.2 SW.3 U2.17 | length 5.7
  Top Layer w0.254: v1(5.5,11.8) 5.585,11.715 5.585,10.172 5.734,10.023 6.377,10.023 SW.3
  Bottom Layer w0.254: U2.17 4.438,11.753 5.453,11.753 v1(5.5,11.8) 6.75,11.8 R3.2
CO: J1.2 U2.49 | length 6.4
  Top Layer w0.254: J1.2 -9.717,5.275 -8.038,3.596 v1(-5.296,3.596)
  Bottom Layer w0.254: v1(-5.296,3.596) -5.296,3.689 -4.735,4.25 U2.49
DO: J1.3 U2.56 | length 5.9
  Top Layer w0.254: J1.3 -9.29,6 -7.39,7.9 v1(-7.3,7.9)
  Bottom Layer w0.254: v1(-7.3,7.9) -5.4,7.9 -5.25,7.75 U2.56
GND: C1.1 C11.2 C12.2 C14.2 C15.2 C16.2 C17.2 C19.2 C20.1 C21.2 C22.1 C23.2 C24.2 C25.1 C26.2 C27.1 C28.2 C31.1 C32.1 C33.2 J1.1 J1.S1 J1.S2 J2.S1 J2.S2 J3.3 J3.S1 J3.S2 P1.2 P2.2 SW.1 SW.2 U1.9 U1.18 U1.20 U1.25 U2.7 U2.20 U2.25 U2.35 U2.40 U2.55 U2.59 U2.65 U3.4 U3.9 U4.2 U5.3 U5.4 U5.5 U7.4 U7.9 | length 49
  Top Layer w0.254: C1.1 -12.75,-4.475 -12.427,-4.798 -12.427,-6.097 -11.599,-6.925 ; U5.3 -11.599,-6.925 ; U5.5 -8.554,-8.175 -8.692,-8.313 -8.692,-8.37 -8.884,-8.562 -9.911,-8.562 -10.102,-8.37 -10.102,-8.313 -10.24,-8.175 U5.4 -10.709,-8.066 -11.413,-8.066 -11.604,-7.875 -11.604,-6.931 -11.599,-6.925 ; SW.1 7.1,4.8 v1(8.6,4.8)
  Bottom Layer w0.254: U7.4 -6.587,-1.057 -6.587,-0.708 -6.523,-0.644 -6.523,-0.408 -6.2,-0.085 U7.9 ; U7.9@-6.215,-0.1 v1(-5.9,-0.1) ; v1(-5.9,9.025) -5.8,9.025 -5.575,9.25 U2.59 ; v1(-5,-10) C26.2 ; U2.55@-4.435,7.25 -6.202,7.25 v1(-6.289,7.164) ; U1.20 -0.6,-5.9 U1.25 ; v1(-1.475,13.9) -1.475,13.85 -1.152,13.527 -1.061,13.527 -0.75,13.216 U2.7 ; U4.2 v1(-1.2,-11.6) ; C32.1 -0.675,-7.95 -1,-7.625 U1.18 -0.983,-6.828 -0.983,-6.511 -0.971,-6.499 -0.971,-6.351 v1(0,-5.38) U1.25 ; U2.40 0.25,2.65 0.443,2.457 v1(0.443,2.419) ; v1(1.4,-11.3) C22.1 ; v1(2.5,0.525) 3.5,0.525 ; C25.1 v1(2.7,-9.6) ; U2.35 2.753,3.562 2.753,2.931 3.105,2.579 3.5,2.184 3.5,0.525 ; v1(3,-11.3) C23.2 ; v1(3,-4.475) 3,-5.2 ; v1(4.3,0.525) 3.5,0.525 ; U2.25 4.438,7.753 5.053,7.753 5.282,7.982 5.282,8.288 v1(5.367,8.373) ; U2.20 5.145,10.25 5.395,10 5.395,8.401 v1(5.367,8.373) ; C24.2 v1(4.6,-6.6) 4.525,-6.6 4.05,-6.125 v1(3,-6.125) 3,-5.2 ; U3.4 6.4,-6.193 6.4,-5.608 6.807,-5.2 U3.9@6.992,-5.2 ; C15.2 6.75,8.975 6.148,8.373 v1(5.367,8.373) ; v1(7.142,-5.215) 10.517,-5.215 ; C21.2 10.517,-5.215 ; C20.1 10.517,-5.215 ; v1(-6.289,7.164) C14.2 -6.289,7.175 v1(-6.289,7.164) ; U1.25 0.2,-5.1 U1.9 2.9,-5.1 3,-5.2
  other v1: -4.425,-6.2 -4.425,-4.6 -2.4,5.6 2.3,5.7 0,8 0,10.5
IR: P1.3 U2.45 | length 18
  Top Layer w0.254: v1(-2.201,2.633) -0.523,4.311 1.945,4.311 3.834,6.2 8.5,6.2 10.5,4.2 P1.3@12.5,4.2
  Bottom Layer w0.254: U2.45 -2.247,3.562 -2.247,2.679 v1(-2.201,2.633)
MCLR: C19.1 J3.1 R7.1 U2.9 | length 12.1
  Top Layer w0.254: C19.1 -7.65,10.675 -7.327,10.998 -7.327,11.048 -7.1,11.275 R7.1@-4.9,11.275 ; R7.1 R7.1@-4.9,11.275 ; J3.1 J3.1@-1.625,11.275 ; v1(1,13.6) 0,13.6 -1.568,12.032 -1.568,11.332 J3.1@-1.625,11.275 ; R7.1@-4.9,11.275 -3.9,11.275 -3.4,11.275 J3.1@-1.625,11.275
  Bottom Layer w0.254: U2.9 0.253,12.438 0.253,12.938 0.915,13.6 v1(1,13.6)
NetC26_1: C26.1 U4.4 | length 1.5
  Bottom Layer w0.254: C26.1 -2.2,-10 U4.4
NetC33_1: C33.1 U1.10 | length 2.8
  Bottom Layer w0.254: U1.10 1.918,-5.5 2.125,-5.707 2.125,-6.6 2.627,-7.102 2.627,-7.152 2.95,-7.475 C33.1
NetJ2_1: J2.1 U7.2 | length 18.5
  Top Layer w0.254: v1(-5.3,-2.1) -5.269,-2.069 9.345,-2.069 10.206,-2.929 10.206,-4.279 J2.1@10.299,-4.373
  Bottom Layer w0.254: U7.2 -5.587,-1.083 -5.587,-1.692 -5.3,-1.979 v1(-5.3,-2.1)
NetJ2_2: J2.2 U7.3 | length 18.7
  Top Layer w0.254: v1(-6.3,-2) -6.3,-2.121 -6.031,-2.39 -6.031,-2.469 -5.478,-3.022 2.581,-3.022 3.39,-3.831 8.578,-3.831 9.862,-5.115 J2.2@10,-5.115
  Bottom Layer w0.254: v1(-6.3,-2) -6.3,-1.945 -6.1,-1.745 U7.3
NetJ2_3: J2.3 U3.2 | length 4.1
  Top Layer w0.254: v1(7.627,-7.2) 7.627,-6.673 8.53,-5.77 9.614,-5.77 J2.3
  Bottom Layer w0.254: U3.2 7.405,-6.213 7.405,-6.858 7.627,-7.079 v1(7.627,-7.2)
NetJ2_4: J2.4 U3.3 | length 4.8
  Top Layer w0.254: v1(7.7,-8.2) 7.799,-8.2 J2.4@9.4,-6.598
  Bottom Layer w0.254: U3.3 6.892,-7.499 7.593,-8.2 v1(7.7,-8.2)
NetR9_1: R9.1 U3.7 | length 1.6
  Bottom Layer w0.254: U3.7 7.392,-3.2 7.742,-2.85 R9.1
NetR10_1: R10.1 U4.3 | length 2.2
  Bottom Layer w0.254: R10.1 -3.402,-11.848 -3.052,-11.848 -2.523,-12.377 -2.298,-12.377 -2.15,-12.525 U4.3
NetR15_1: R15.1 U7.7 | length 1.4
  Bottom Layer w0.254: U7.7 -5.6,1.8 -5.25,2.15 R15.1
PGC: J3.5 U2.15 | length 5.5
  Top Layer w0.254: J3.5 1.6,11.55 1.723,11.673 3.273,11.673 3.95,12.35 3.95,13.448 v1(4.002,13.5)
  Bottom Layer w0.254: U2.15 3.25,12.735 3.366,12.851 3.366,12.97 3.896,13.5 v1(4.002,13.5)
PGD: J3.4 U2.16 | length 7
  Top Layer w0.254: J3.4 0.832,11.268 0.832,10.568 1.1,10.3 2.8,10.3 4.615,12.115 4.615,12.515 v1(4.7,12.6)
  Bottom Layer w0.254: U2.16 3.75,12.597 3.753,12.6 v1(4.7,12.6)
SCL: R23.1 U1.23 U2.42 U5.8 | length 19.2
  Top Layer w0.254: U5.8 -8,-4.425 -7.7,-4.425 -7.7,-2.366 -6.603,-1.269 -3.438,-1.269 v1(-3.369,-1.338)
  Bottom Layer w0.254: R23.1 -2.8,-4.9 -2.6,-4.7 ; U1.23 -2.6,-4.7 ; U2.42 -0.753,3.562 -0.753,3.047 -3.4,0.4 -3.4,-3.9 -2.6,-4.7
SDA: R22.1 U1.24 U2.41 U5.7 | length 24
  Top Layer w0.254: U5.7 -8,-5.675 -7.7,-5.675 -7.589,-5.564 -6.89,-5.564 -6.506,-5.181 -6.506,-4.297 -5.962,-3.753 v1(-2.513,-3.753)
  Bottom Layer w0.254: U1.24 -1.966,-4.3 -2.6,-3.666 -2.6,-2.4 ; U2.41 -0.25,2.65 -2.6,0.3 -2.6,-2.4 ; R22.1 2.3,-1.8 1.7,-2.4 -2.6,-2.4
VBAT: C21.1 C22.2 C23.1 C28.1 P2.1 R10.2 U3.1 U4.1 U7.1 | length 45
  Bottom Layer w0.254: U7.1 -5.1,-1.3 -5.087,-1.313 -4.857,-1.313 -4.569,-1.601 -4.569,-2.403 -5.266,-3.1 -5.9,-3.1 -6.665,-3.865 -6.665,-5.558 -6.396,-5.827 -6.098,-5.827 -5.775,-6.15 -5.775,-10.825 -3.75,-12.85 -3.65,-12.85 -2.8,-13.7 -0.7,-13.7 -0.398,-13.398 -0.398,-12.898 U4.1 1.277,-12.75 C22.2 C23.1 5.179,-12.627 P2.1 6.261,-9.939 7.084,-9.116 8.261,-9.116 9.167,-8.209 ; U3.1 8.982,-6.2 C21.1 9.167,-8.209 ; v1(13.1,-0.4) 13.1,-5.1 9.991,-8.209 9.167,-8.209
pads on no net: SW.4 U1.1 U1.2 U1.3 U1.4 U1.5 U1.6 U1.7 U1.11 U1.12 U1.14 U1.15 U1.16 U1.17 U1.19 U1.21 U1.22 U2.1 U2.2 U2.3 U2.4 U2.5 U2.6 U2.10 U2.11 U2.12 U2.13 U2.14 U2.18 U2.21 U2.22 U2.23 U2.24 U2.27 U2.28 U2.31 U2.32 U2.33 U2.36 U2.37 U2.38 U2.43 U2.44 U2.46 U2.47 U2.48 U2.52 U2.53 U2.57 U2.58 U2.61 U2.62 U2.63 U2.64 U5.6

## Polygon pours and split planes (outlines as drawn)
GND on Bottom Layer "Bot gnd" (solid, shelved, pour order 73): -17.4,15.3 -17.4,-15.8 16.8,-15.8 16.8,15.3
GND on Top Layer "Top gnd" (solid, shelved, pour order 74): -15.3,15.6 -15.3,-15.6 16,-15.6 16,15.6

## Silkscreen, mask and mechanical layers (free items; w line width, h text height)
Top Overlay:
  circle w0.127: c10.5,0 r2.7
  circle w0.127: c-10.5,0 r2.7
Bottom Solder:
  circle w1.2: c-5,18 r2.1
  circle w1.2: c-35,18 r2.1
Board Outline:
  circle w0.254: c0,0 r15